# Altium PCB PCB1.PcbDoc
Units mm, origin at the board's own origin, x right, y up, seen from the top; angles counter-clockwise.
Board outline 152.4 x 101.6 mm, 2 copper layers (Top Layer, Bottom Layer); 2 components, 3 nets, 10 pads, 3 vias.
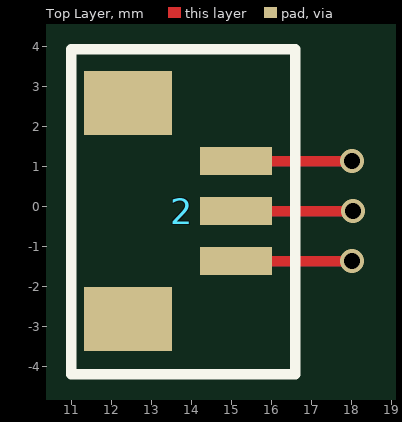
[diagram p0: Top Layer view]
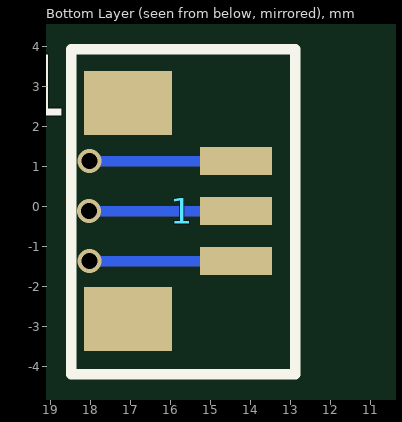
[diagram p1: Bottom Layer view, seen from below]

## Layer stack, top to bottom
Top Solder: solder mask 0.0102, Solder Resist, Dk 3.5
Top Layer: signal copper 0.0356
Dielectric 1: dielectric 0.32, FR-4, Dk 4.8
Bottom Layer: signal copper 0.0356
Bottom Solder: solder mask 0.0102, Solder Resist, Dk 3.5

## Board outline
-64.135,-53.721 88.265,-53.721 88.265,47.879 -64.135,47.879

## Design rules (kind name [scope] priority, off if disabled: settings)
Clearance [All] p1: gap=0.254
PolygonConnect [All] p1: connectstyle=Relief reliefconductorwidth=0.254 reliefentries=4 polygonreliefangle="90 Angle" airgapwidth=0.254
RoutingVias [All] p1: holewidth=0.711 width=1.27 viastyle="Through Hole" minholewidth=0.711 minwidth=1.27 maxholewidth=0.711 maxwidth=1.27
SolderMaskExpansion [All] p1: expansion=0.102
Width [All] p1: maxlimit=0.254 minlimit=0.254 preferedwidth=0.254
29 further rules are at their usual default settings.

## Components (designator, comment, footprint, x,y, rotation, side; value= is the part's Value field where it differs from the comment)
1 "Plugin3P" Plugin3P 14.351,-0.127 r270 bottom
2 "Plugin3P" Plugin3P 15.113,-0.127 r270 top

## Footprints (in the part's own frame and the unit in brackets; to place one, negate y for a bottom-side part, rotate by r counter-clockwise, add the part's x,y. Pads: shape width x height; smd on the part's side, far side on the other; paste and mask are expansions set on the pad)
Plugin3P [mm]
  rect 0.7x1.8 smd: 1(-1.25,0) 2(0,0) 3(1.25,0)
  rect 1.6x2.2 smd: ""(-2.7,-2.7) ""(2.7,-2.7)
  silkscreen extent -4.05,-4.13 4.08,1.48

## Via types
v1: diameter 0.6, hole 0.4, Top Layer to Bottom Layer, 3 vias

## Nets (pads, with @x,y where several pads share a name; then routed paths per layer and width w, separated by ;. In a path a pad name is that pad's centre, name@x,y a point inside that pad or via, vN(x,y) a via of type N, cw(c..) or ccw(c..) an arc to the next point about the centre after c; other vN are vias at no path point)
Net1_1: 1.1 2.1 | length 6.6
  Top Layer w0.254: 2.1 v1(18.014,1.123)
  Bottom Layer w0.254: 1.1 v1(18.014,1.123)
Net1_2: 1.2 2.2 | length 6.6
  Top Layer w0.254: 2.2 v1(18.034,-0.127)
  Bottom Layer w0.254: 1.2 v1(18.034,-0.127)
Net1_3: 1.3 2.3 | length 6.6
  Top Layer w0.254: 2.3 v1(18.014,-1.377)
  Bottom Layer w0.254: 1.3 v1(18.014,-1.377)
pads on no net: 1. 2.

## Silkscreen, mask and mechanical layers (free items; w line width, h text height)
Mechanical 1:
  lines w0.254: -21.569,0.198 -25.019,0 -24.333,4.331 -21.292,3.532 -20.414,6.875 ; -21.539,0.231 -21.341,-3.22 -24.481,-3.4 -23.794,-7.731 -20.574,-6.477 ; -20.556,-6.437 -19.302,-9.657 -22.232,-10.798 -20.241,-14.706 -17.566,-12.518 ; -20.452,6.853 -23.794,7.731 -21.804,11.639 -19.158,9.939 -17.29,12.847 ; -17.561,-12.474 -15.373,-15.149 -17.807,-17.14 -14.706,-20.241 -12.838,-17.333 ; -17.333,12.838 -20.241,14.706 -17.14,17.807 -15.149,15.373 -12.474,17.561 ; -12.847,-17.29 -9.939,-19.158 -11.639,-21.804 -7.731,-23.794 -6.853,-20.452 ; -12.518,17.566 -14.706,20.241 -10.798,22.232 -9.657,19.302 -6.437,20.556 ; -8.544,-1.353 ccw(c0,0) 8.544,-1.353 ; -8.544,1.353 cw(c0,0) 8.544,1.353 ; -8.509,-1.27 -6.604,-1.27 -6.604,-0.508 -6.604,0.762 -6.604,1.27 -8.509,1.27 ; -6.875,-20.414 -3.532,-21.292 -4.331,-24.333 0,-25.019 -0.198,-21.569 ; -6.477,20.574 -7.731,23.794 -3.4,24.481 -3.22,21.341 0.231,21.539 ; -0.231,-21.539 3.22,-21.341 3.4,-24.481 7.731,-23.794 6.477,-20.574 ; 0.198,21.569 0,25.019 4.331,24.333 3.532,21.292 6.875,20.414 ; 6.437,-20.556 9.657,-19.302 10.798,-22.232 14.706,-20.241 12.518,-17.566 ; 6.853,20.452 7.731,23.794 11.639,21.804 9.939,19.158 12.847,17.29 ; 8.509,-1.27 6.604,-1.27 6.604,-0.762 6.604,0.508 6.604,1.27 8.509,1.27 ; 12.474,-17.561 15.149,-15.373 17.14,-17.807 20.241,-14.706 17.333,-12.838 ; 12.838,17.333 14.706,20.241 17.807,17.14 15.373,15.149 17.561,12.474 ; 17.29,-12.847 19.158,-9.939 21.804,-11.639 23.794,-7.731 20.452,-6.853 ; 17.566,12.518 20.241,14.706 22.232,10.798 19.302,9.657 20.556,6.437 ; 20.414,-6.875 21.292,-3.532 24.333,-4.331 25.019,0 21.569,-0.198 ; 20.574,6.477 23.794,7.731 24.481,3.4 21.341,3.22 21.539,-0.231